# Altium PCB NixieAdapterIN14.PcbDoc
Units mil, origin at the board's own origin, x right, y up, seen from the top; angles counter-clockwise.
Board outline 787.4 x 1771.65 mil, 2 copper layers (Top Layer, Bottom Layer); 3 components, 14 nets, 31 pads, 5 vias.
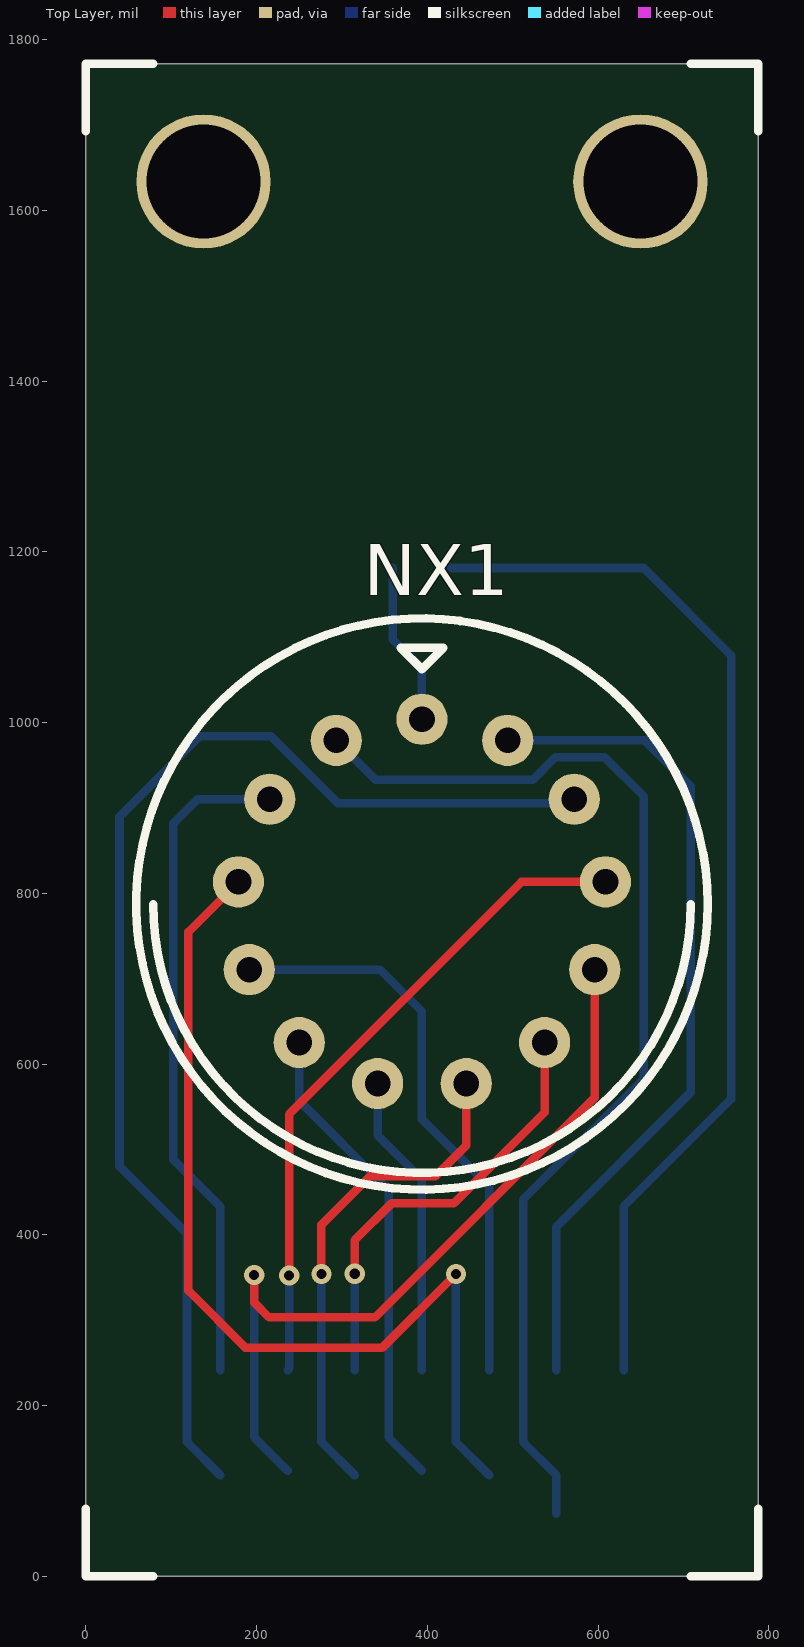
[diagram p0: Top Layer view]
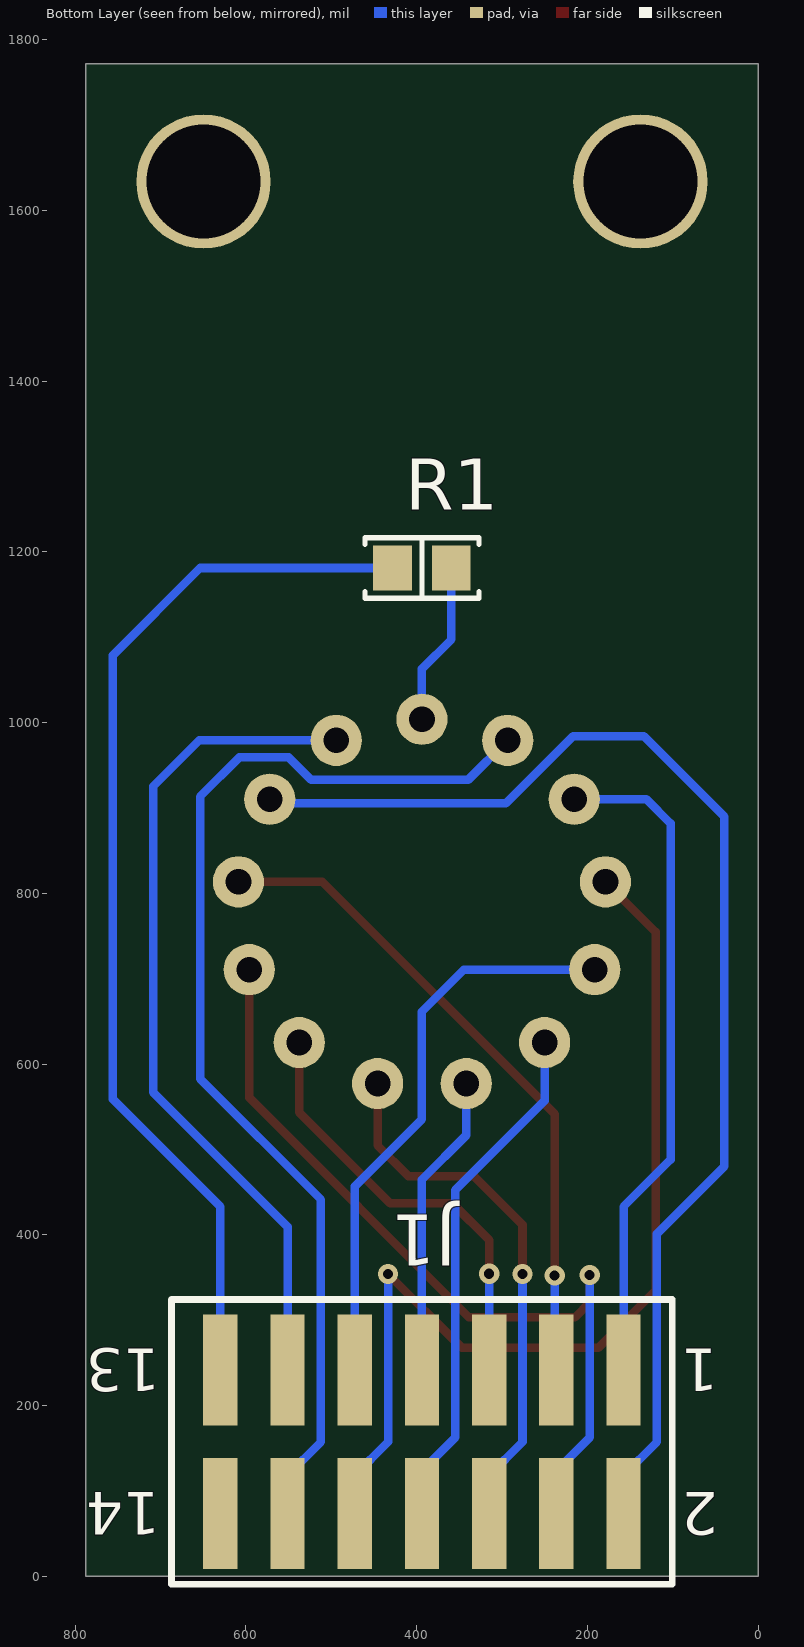
[diagram p1: Bottom Layer view, seen from below]

## Layer stack, top to bottom
Top Solder: solder mask 0.4, Solder Resist, Dk 3.5
Top Layer: signal copper 1.4
Dielectric 1: dielectric 12.6, FR-4, Dk 4.8
Bottom Layer: signal copper 1.4
Bottom Solder: solder mask 0.4, Solder Resist, Dk 3.5

## Board outline
0,0 0,1771.65 787.4,1771.65 787.4,0

## Design rules (kind name [scope] priority, off if disabled: settings)
Clearance [All] p1: gap=10 ignorepadtopadclearanceinfootprint=FALSE except(0: Arc-Hole Track-Hole SMDPad-Hole THPad-Hole Via-Hole Fill-Hole Poly-Hole Region-Hole Text-Hole)
PolygonConnect [All] p1: connectstyle=Relief reliefconductorwidth=10 reliefentries=4 polygonreliefangle="90 Angle" airgapwidth=10
RoutingVias [All] p1: holewidth=28 width=50 viastyle="Through Hole" minholewidth=28 minwidth=50 maxholewidth=28 maxwidth=50
SolderMaskExpansion [All] p1: expansion=4 istentingtop=FALSE
Width [All] p1: maxlimit=10 minlimit=10 preferedwidth=10
30 further rules are at their usual default settings.

## Components (designator, comment, footprint, x,y, rotation, side; value= is the part's Value field where it differs from the comment)
J1 "SAMTEC-TMM-107-01-X-D-SM" SAMTEC-TMM-107-01-X-D-SM 393.7,157.48 r0 bottom
NX1 "IN14" "IN-14 Nixie Tube" 393.7,787.4 r180 top
R1 "15 kOhms" "RES 0805_2012" 393.7,1181.1 r180 bottom

## Footprints (in the part's own frame and the unit in brackets; to place one, negate y for a bottom-side part, rotate by r counter-clockwise, add the part's x,y. Pads: shape width x height; smd on the part's side, far side on the other; paste and mask are expansions set on the pad)
"IN-14 Nixie Tube" [mil] "IN-14 Nixie Tube"
  round 60 hole 30: 1(0,-216.54) 2(-100.39,-191.73) 3(-178.35,-122.83) 4(-214.96,-25.98) 5(-202.36,76.77) 6(-143.7,162.2) 7(-51.97,210.24) 8(51.97,210.24) 9(143.7,162.2) 10(202.36,76.77) 11(214.96,-25.98) 12(178.35,-122.83) 13(100.39,-191.73)
  silkscreen extent -335,-335 334,335
"RES 0805_2012" [mm] "Chip Resistor, 2-Leads, Body 2.00x1.25mm, IPC Medium Density"
  rect 1.15x1.35 smd: 1(-0.875,0) 2(0.875,0)
  silkscreen extent -1.7,-0.9 1.7,0.9, body extent -1,-0.62 1,0.63, height 0.6
SAMTEC-TMM-107-01-X-D-SM [mm]
  rect 1.02x3.3 smd mask+0: 1(-6,-2.134) 2(-6,2.134) 3(-4,-2.134) 4(-4,2.134) 5(-2,-2.134) 6(-2,2.134) 7(0,-2.134) 8(0,2.134) 9(2,-2.134) 10(2,2.134) 11(4,-2.134) 12(4,2.134) 13(6,-2.134) 14(6,2.134)
  silkscreen extent -7.45,-4.24 7.45,4.24, body extent -7,-3.53 7,3.53, height 5.97

## Part data
J1: Package=None, Availability=Unavailable, MP=SAMTEC-TMM-107-01-X-D-SM, Price=None
NX1: "IN-14 Nixie Tube"
R1: library part CRCW080515K0FKEAHP, "RES SMD 15K OHM 1% 1/2W 0805", Device Package="0805 (2012 Metric)", Manufacturer="Vishay Dale", Operating Temperature="-55°C ~ 155°C", Power (Watts)="0.5W, 1/2W", Ratings=AEC-Q200, Supplier Device Package=0805, Supplier Part Number 1=541-15.0KTCT-ND, Temperature Coefficient=±100ppm/°C, Tolerance=±1%, ComponentLink1Description=Datasheet, ComponentLink1URL=http://www.vishay.com/docs/20043/crcwhpe3.pdf, ComponentLink2Description="DigiKey Link", ComponentLink2URL=http://digikey.com/product-detail/en/vishay-dale/CRCW080515K0FKEAHP/541-15.0KTCT-ND/2222869, Composition="Thick Film", Features="Automotive AEC-Q200, Pulse Withstanding", Height - Seated (Max)="0.020\" (0.50mm)", LastUpdated="2/09/2020 1:15:18 am", Lifecycle Status=Active, Minimum Order=1, Number of Terminations=2, Package / Case="0805 (2012 Metric)", Packaging=TapeAndReel, Part Number=CRCW080515K0FKEAHP, Part Status=Active, PartId=30346, Price=0.03, Resistance="15 kOhms", Series=CRCW-HP, Size / Dimension="0.079\" L x 0.049\" W (2.00mm x 1.25mm)", Supplier 1=DigiKey

## Free pads (board coordinates)
  round 157.48 hole 133.86: MH1(137.8,1633.86) MH2(649.61,1633.86)

## Via types
v1: diameter 23.62, hole 11.81, Top Layer to Bottom Layer, 5 vias

## Nets (pads, with @x,y where several pads share a name; then routed paths per layer and width w, separated by ;. In a path a pad name is that pad's centre, name@x,y a point inside that pad or via, vN(x,y) a via of type N, cw(c..) or ccw(c..) an arc to the next point about the centre after c; other vN are vias at no path point)
ANODE: J1.13 R1.1 | length 1259.6
  Bottom Layer w10: R1.1 653.54,1181.1 755.91,1078.74 755.91,559.06 629.92,433.07 J1.13
COMMA_1: J1.11 NX1.2 | length 985.8
  Bottom Layer w10: NX1.2 654.72,979.13 708.66,925.2 708.66,566.93 551.18,409.45 J1.11
COMMA_2: J1.12 NX1.13 | length 1323.8
  Bottom Layer w10: NX1.13 339.37,933.07 523.62,933.07 549.69,959.13 607.8,959.13 653.66,913.27 653.66,582.8 512.15,441.28 512.15,356.3 512.15,157.38 551.18,118.35 J1.12
DIGIT_0: J1.1 NX1.12 | length 788
  Bottom Layer w10: J1.1 157.48,433.07 102.36,488.19 102.36,881.89 130.71,910.24 NX1.12
DIGIT_1: J1.2 NX1.3 | length 1426.7
  Bottom Layer w10: J1.2@157.48,118.35 118.44,157.38 118.44,401.24 39.37,480.31 39.37,889.76 133.86,984.25 216.54,984.25 295.28,905.51 567.32,905.51 NX1.3
DIGIT_2: J1.3 NX1.4 | length 783.8
  Top Layer w10: v1(238.19,352.36) 238.19,541.34 510.24,813.39 NX1.4
  Bottom Layer w10: J1.3 238.19,243.46 v1(238.19,352.36)
DIGIT_3: J1.4 NX1.5 | length 940.1
  Top Layer w10: v1(197.19,352.7) 197.19,320.53 214.57,303.15 338.58,303.15 596.06,560.63 NX1.5
  Bottom Layer w10: v1(197.19,352.7) 197.19,162.66 J1.4@236.22,123.62
DIGIT_4: J1.5 NX1.6 | length 518.5
  Top Layer w10: v1(314.96,354.33) 314.96,393.7 358.27,437.01 431.1,437.01 537.4,543.31 NX1.6
  Bottom Layer w10: J1.5 v1(314.96,354.33)
DIGIT_5: J1.6 NX1.7 | length 590.3
  Top Layer w10: v1(275.93,354) 275.93,411.75 332.68,468.5 409.45,468.5 445.67,504.72 NX1.7
  Bottom Layer w10: v1(275.93,354) 275.93,157.38 J1.6@314.96,118.35
DIGIT_6: J1.7 NX1.8 | length 357.2
  Bottom Layer w10: NX1.8 341.73,516.54 393.7,464.57 J1.7
DIGIT_7: J1.8 NX1.9 | length 561.1
  Bottom Layer w10: NX1.9 250,557.09 354.67,452.42 354.67,162.66 J1.8@393.7,123.62
DIGIT_8: J1.9 NX1.10 | length 675.3
  Bottom Layer w10: NX1.10 344.49,710.63 393.7,661.42 393.7,535.43 472.44,456.69 J1.9
DIGIT_9: J1.10 NX1.11 | length 1131.6
  Top Layer w10: NX1.11 120.08,754.72 120.08,334.65 187.01,267.72 347.13,267.72 v1(433.41,354)
  Bottom Layer w10: v1(433.41,354) 433.41,157.38 J1.10@472.44,118.35
NetNX1_1: NX1.1 R1.2 | length 191.4
  Bottom Layer w10: R1.2 359.25,1097.44 393.7,1062.99 NX1.1
pads on no net: J1.14

## Silkscreen, mask and mechanical layers (free items; w line width, h text height)
Top Overlay:
  lines w10: 0,78.74 0,0 78.74,0 ; 0,1692.91 0,1771.65 78.74,1771.65 ; 708.66,0 787.4,0 787.4,78.74 ; 708.66,1771.65 787.4,1771.65 787.4,1692.91
Outline:
  the board outline again, w10
Top Assembly:
  lines w10: 97.73,679.68 ccw(c393.7,787.4) 689.67,679.68 ; 227.67,1077.96 ccw(c393.7,787.4) 559.73,1077.96 ; 354.33,787.4 433.07,787.4 ; 393.7,748.03 393.7,826.77

## Text inside footprints (layer, text, board x,y; h text height)
J1: Bottom Overlay "14" at 700.43,98.46 h50 r180; Bottom Overlay "13" at 700.43,266.5 h50 r180; Bottom Overlay "2" at 46.46,98.46 h50 r180; Bottom Overlay "1" at 46.46,266.5 h50 r180; Mechanical 13 "14" at 700.43,98.46 h50 r180; Mechanical 13 "13" at 700.43,266.5 h50 r180; Mechanical 13 "2" at 46.46,98.46 h50 r180; Mechanical 13 "1" at 46.46,266.5 h50 r180